# Allegro board KG200Z-TE.brd
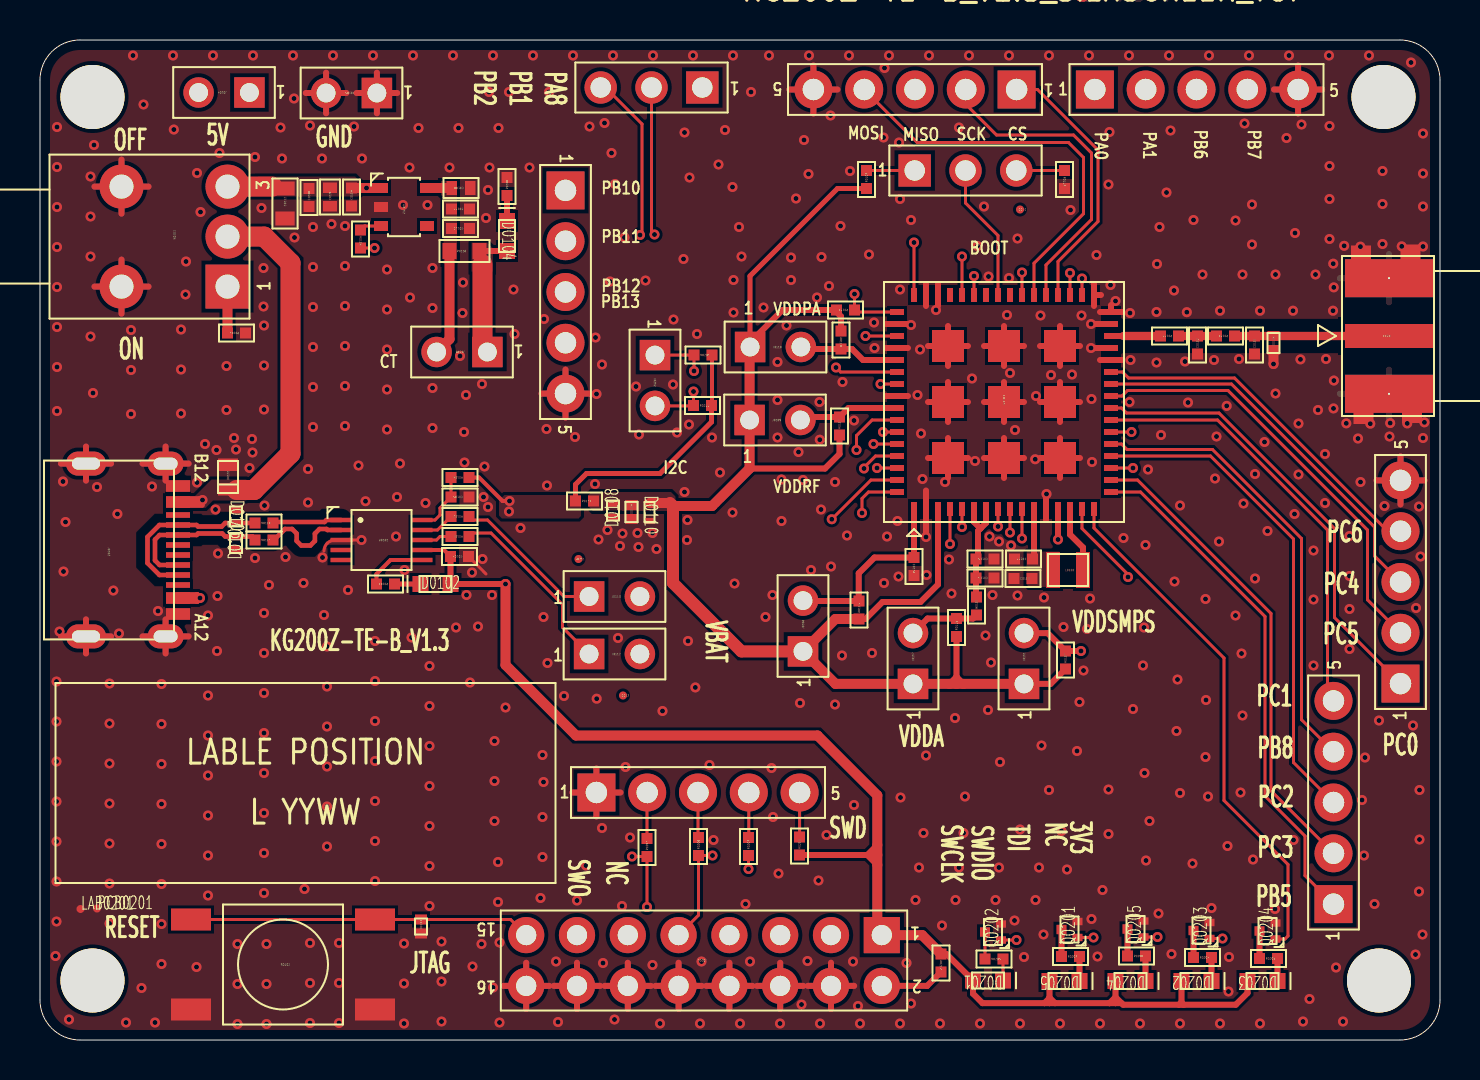
[diagram p0: board, top side]
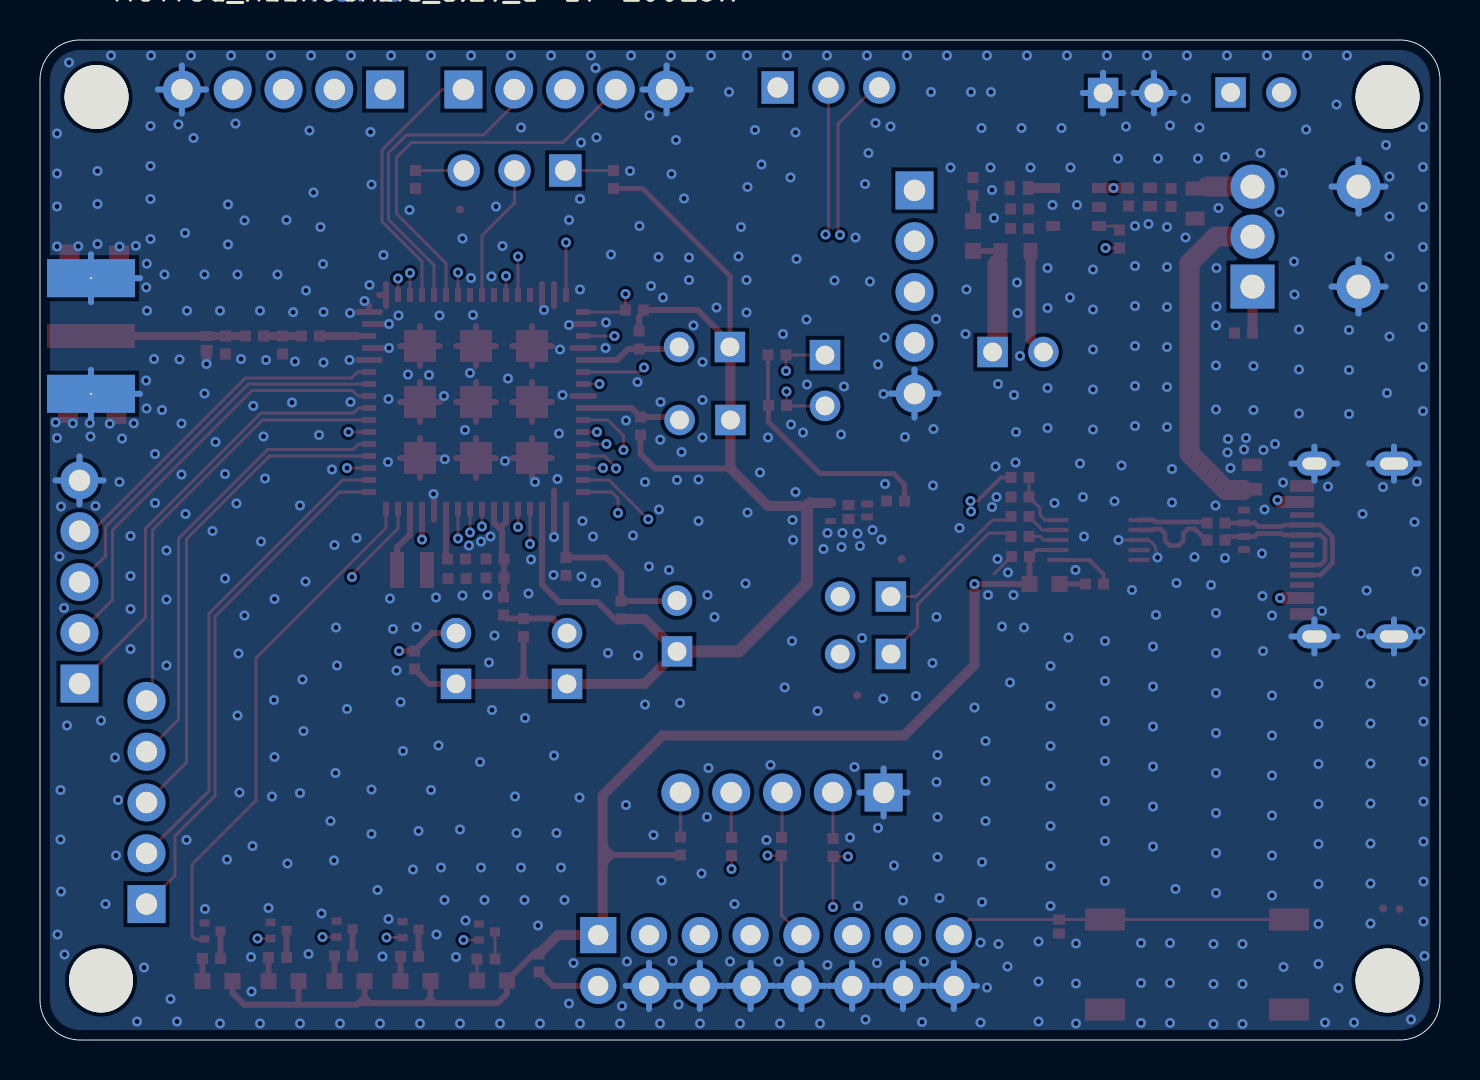
[diagram p1: board, bottom side, seen from below]

Outline 70 x 50 mm; copper layers: TOP, INNER LAYER 2, INNER LAYER 3, BOTTOM. Coordinates in mm from the lower left corner of the outline.
Outline path: 0,48 0,2 arc(0.59,0.59) 2,0 68,0 arc(69.41,0.59) 70,2 70,48 arc(69.41,49.41) 68,50 2,50 arc(0.59,49.41) 0,48

## Design rules (mm)
net group 50OHM: nets 50OHM_LORA_2 50OHM_LORA_3
net group 90OHM_USB_D: nets 90OHM_USB_DN 90OHM_USB_DP
net group DP1: nets 90OHM_USB_DN_C 90OHM_USB_DP_C

## Placement (name value [footprint] x y rotation side)
B0101  600ohm@100MHz DCR=0.340ohm 0.5A  [B-0402_H0_65]  46.83 21.7 90 top
C0101  NM-6.8pF +/-0.5pF 50V  [C-0402]  60.73 34.75 90 top
C0102  NM-6.8pF +/-0.5pF 50V  [C-0402]  57.88 34.75 90 top
C0104  100nF +/-10% 10V  [C-0402]  20.98 24.18 180 top
C0105  NM-100nF +/-10% 10V  [C-0402]  21 27.15 180 top
C0106  100nF +/-10% 10V  [C-0402]  13.45 42.12 90 top
C0107  4.7uF +/-20% 10V  [C-0402_4_7_10UF_H0_65]  14.5 42.15 90 top
C0108  4.7uF +/-20% 10V  [C-0402_4_7_10UF_H0_65]  21.05 42.6 180 top
C0109  100nF +/-10% 10V  [C-0402]  15.57 42.15 90 top
C0110  100nF +/-10% 10V  [C-0402]  21.02 40.58 180 top
C0111  1uF +/-10% 25V  [C-0402]  21.02 41.55 180 top
C0112  10uF +/-20% 10V  [C-0603_22_47UF_H1_00]  12.25 41.83 90 top
C0113  470nF +/-10% 6.3V  [C-0402]  49.15 23.07 0 top
C0114  4.7uF +/-20%  16V  [C-0402_H0_65]  47.25 23.1 180 top
C0115  100nF +/-10% 10V  [C-0402]  47.25 24.05 180 top
C0116  100nF +/-10% 10V  [C-0402]  43.7 23.68 270 top
C0117  100nF +/-10% 10V  [C-0402]  49.17 24.05 180 top
D0101  -  [PTVSHC2EN7VU]  9.4 28.15 90 top
D0102  -  [LTST-C193KRKT-5A]  19.77 22.8 0 top
D0103  -  [PESDNC9D5VB]  19.05 5.67 90 top
D0104  -  [LTST-C193KRKT-5A]  23.35 40.2 270 top
D0105  NM-PESDMC2FD5VB  [PESDMC2FD5VB]  61.67 34.85 90 top
D0106  -  [WE05DUCF-BF]  9.8 26.18 270 top
D0107  -  [WE05DUCF-BF]  9.8 24.85 90 top
D0108  -  [WE05DUCF-BF]  28.65 26.48 90 top
D0109  -  [PESDNC2FD5VB]  29.57 26.4 90 top
D0110  TEA10402V05B0  [LXES15AAA1-153]  30.48 26.4 270 top
D0201  -  [LTST-C193TBKT-5A]  47.4 2.98 180 top
D0202  -  [LTST-C193TBKT-5A]  57.83 2.95 180 top
D0203  -  [LTST-C193TBKT-5A]  61.12 2.95 180 top
D0204  -  [LTST-C193TBKT-5A]  54.52 2.95 180 top
D0205  -  [LTST-C193TBKT-5A]  51.23 2.95 180 top
H0201  npth_cir3_20  [NPTH_CIR3_20]  2.62 47.15 0 top
H0202  npth_cir3_20  [NPTH_CIR3_20]  2.62 2.98 0 top
H0203  npth_cir3_20  [NPTH_CIR3_20]  66.95 2.98 0 top
H0204  npth_cir3_20  [NPTH_CIR3_20]  67.17 47.15 0 top
J0101  C2542VD10205G0105PE  [IDE_2_2_54]  49.2 19.07 90 top
J0102  -  [UC6-0B1631R0-N]  3.45 24.5 270 top
J0103  -  [HC1650650]  67.45 35.2 180 top
J0104  C2542VD10205G0105PE  [IDE_2_2_54]  9.2 47.38 180 top
J0105  C2542VD10205G0105PE  [IDE_2_2_54]  15.57 47.35 180 top
J0106  C2542VD10205G0105PE  [IDE_2_2_54]  38.15 20.7 90 top
J0107  C2542VD10205G0105PE  [IDE_2_2_54]  43.65 19.07 90 top
J0108  C2542VD10205G0105PE  [IDE_2_2_54]  21.1 34.4 180 top
J0109  C2542VD10205G0105PE  [IDE_2_2_54]  36.75 31 0 top
J0110  C2542VD10205G0105PE  [IDE_2_2_54]  36.77 34.65 0 top
J0111  -  [KR2542VD10310G0101PX]  46.27 43.48 0 top
J0112  C2542VD10205G0105PE  [IDE_2_2_54]  28.73 19.3 0 top
J0113  C2542VD10205G0105PE  [IDE_2_2_54]  28.73 22.18 0 top
J0201  -  [C254VD208115PK]  33.2 3.98 180 top
J0202  C2542VD10205G0105PE  [IDE_2_2_54]  30.75 32.98 270 top
J0203  -  [KR2542VD10310G0101PX]  30.57 47.62 180 top
J0204  -  [KRQZ050002]  64.67 11.88 90 top
J0205  -  [KRQZ050002]  32.9 12.38 0 top
J0206  -  [KRQZ050002]  43.75 47.52 180 top
J0207  -  [KRQZ050002]  68.03 22.9 90 top
J0208  -  [KRQZ050002]  57.83 47.52 0 top
J0209  -  [KRQZ050002]  26.27 37.4 270 top
J0210  PH254002J-21400  [PH254002J-21400_PINS1_2D4X5]  49 41.52 0 top
J0211  PH254002J-21400  [PH254002J-21400_PINS1_2D4X5]  26.93 24.05 0 top
J0212  PH254002J-21400  [PH254002J-21400_PINS1_2D4X5]  29.15 17.23 0 top
L0102  15uH +/-20% 1.258ohm 440mA  [L-2016]  51.4 23.5 0 top
LAB0201  25x10mm Universal Label Paper_GDL  [LABEL]  2.02 6.55 0 top
PCB0201  PCB  [BOARD_PCB]  2.85 6.58 0 top
Q0201  RUM001L02T2CL  [VMT3_2SK3541-NMOS]  51.48 5.53 90 top
Q0202  RUM001L02T2CL  [VMT3_2SK3541-NMOS]  47.65 5.4 90 top
Q0203  RUM001L02T2CL  [VMT3_2SK3541-NMOS]  58.08 5.47 90 top
Q0204  RUM001L02T2CL  [VMT3_2SK3541-NMOS]  61.38 5.45 90 top
Q0205  RUM001L02T2CL  [VMT3_2SK3541-NMOS]  54.77 5.55 90 top
R0101  0R +/-5% 1/16W  [R-0402]  21 25.18 180 top
R0102  0R +/-5% 1/16W  [R-0402]  21 26.18 180 top
R0103  1K +/-5% 1/16W  [R-0402]  17.27 22.8 180 top
R0104  1K +/-5% 1/16W  [R-0402]  9.82 35.35 180 top
R0105  10K +/-5% 1/16W  [R-0402]  16.02 40.05 270 top
R0106  0R +/-5% 1/16W  [R-0402]  21 28.12 180 top
R0107  0R +/-5% 1/16W  [R-0402]  51.27 19 90 top
R0108  2.2K +/-5% 1/16W  [R-0402]  23.35 42.67 90 top
R0109  0R +/-5% 1/16W  [R-0402]  41.33 43.02 90 top
R0110  0R +/-5% 1/16W  [R-0402]  11.2 25.85 0 top
R0111  0R +/-5% 1/16W  [R-0402]  11.2 25 0 top
R0112  10K +/-5% 1/16W  [R-0402]  51.23 43.02 270 top
R0113  47K +/-5% 1/16W  [R-0402]  40.27 36.5 180 top
R0114  0R +/-5% 1/16W  [R-0402]  40.95 21.5 90 top
R0115  0R +/-5% 1/16W  [R-0402]  45.83 20.62 90 top
R0116  0R +/-5% 1/10W  [R-0603]  21.23 39.45 0 top
R0117  0R +/-5% 1/16W  [R-0402]  39.98 30.7 90 top
R0118  0R +/-5% 1/16W  [R-0402]  40.05 35 270 top
R0119  0R +/-5% 1/16W  [R-0402]  27.23 26.95 0 top
R0120  0R +/-5% 1/16W  [R-0402]  59.27 35.2 180 top
R0121  0R +/-5% 1/16W  [R-0402]  56.48 35.2 180 top
R0201  2.2K +/-5% 1/16W  [R-0402]  33.15 34.25 0 top
R0202  2.2K +/-5% 1/16W  [R-0402]  51.52 4.17 0 top
R0203  2.2K +/-5% 1/16W  [R-0402]  47.7 4.05 0 top
R0204  2.2K +/-5% 1/16W  [R-0402]  58.12 4.12 0 top
R0205  2.2K +/-5% 1/16W  [R-0402]  61.42 4.08 0 top
R0206  2.2K +/-5% 1/16W  [R-0402]  54.83 4.2 0 top
R0207  0R +/-5% 1/16W  [R-0402]  30.35 9.62 90 top
R0208  0R +/-5% 1/16W  [R-0402]  32.92 9.68 90 top
R0209  0R +/-5% 1/16W  [R-0402]  35.42 9.68 90 top
R0210  0R +/-5% 1/16W  [R-0402]  37.98 9.7 90 top
R0211  2.2K +/-5% 1/16W  [R-0402]  33.12 31.73 0 top
R0212  0R +/-5% 1/16W  [R-0402]  45.05 3.85 270 top
S0101  -  [ZK838304R01]  6.72 40.15 90 top
S0102  -  [TVDM04-B043EBS]  12.15 3.77 0 top
U0101  -  [CH340E]  17.07 25 0 top
U0102  WL2803E33-5/TR  [WL2803E33-5_TR_PINS5_3D12X3]  18.2 41.65 270 top
U0103  KG200Z_INTERNAL  [KG200T_INTERNAL]  48.2 31.9 90 top

## Library data of the parts
B0101 = B-0402_H0_65
C0101 C0102 C0104 C0105 C0106 C0109 C0110 C0113 C0115 C0116 C0117 = C
C0107 C0108 = C-0402_4_7_10uF_H0_65
C0111 = C-0402
C0112 = c-0603_22_47uf_H1_00
C0114 = C-0402_H0_65
D0101 = PTVSHC2EN7VU
D0102 D0104 = LTST-C193KRKT-5A
D0103 = PESDNC9D5VB
D0105 = PESDMC2FD5VB
D0106 D0107 D0108 = WE05DUCF-BF
D0109 = PESDNC2FD5VB
D0110 = LXES15AAA1-153
D0201 D0202 D0203 D0204 D0205 = LTST-C193TBKT-5A
H0201 H0202 H0203 H0204 = NPTH
J0101 J0104 J0105 J0106 J0107 J0108 J0109 J0110 J0112 J0113 J0202 = IDE_2_2_54
J0102 = UC6-0B1631R0-N
J0103 = HC1650650
J0111 J0203 = KR2542VD10310G0101PX
J0201 = C254VD208115PK
J0204 J0205 J0206 J0207 J0208 J0209 = KRQZ050002
J0210 J0211 J0212 = PH254002J-21400
L0102 = L-2016
LAB0201 = LABEL
PCB0201 = BOARD_PCB
Q0201 Q0202 Q0203 Q0204 Q0205 = VMT3_2SK3541-NMOS
R0101 R0102 R0103 R0104 R0106 R0107 R0108 R0109 R0112 R0113 R0114 R0115 R0117 R0118 R0119 R0120 R0121 R0201 R0202 R0203 R0204 R0205 R0206 R0207 R0208 R0209 R0210 R0211 R0212 = R-0402
R0105 R0110 R0111 = R
R0116 = R-0603
S0101 = ZK838304R01
S0102 = TVDM04-B043EBS
U0101 = CH340E
U0102 = WL2803E33-5_TR
U0103 = KG200T_INTERNAL

## Footprints (pads in the part's own frame, mm; a bottom-side part is the same pattern mirrored in y, then rotated)
B-0402_H0_65
  rect 0.55x0.55 smd: 1(-0.45,0) 2(0.45,0)
BOARD_PCB
  round 0.4 smd: 1(0,0)
C254VD208115PK
  rect 1.81x1.81 hole 1.01: 1(-8.89,-1.27)
  round 1.81 hole 1.01: 2(-8.89,1.27) 3(-6.35,-1.27) 4(-6.35,1.27) 5(-3.81,-1.27) 6(-3.81,1.27) 7(-1.27,-1.27) 8(-1.27,1.27) 9(1.27,-1.27) 10(1.27,1.27) 11(3.81,-1.27) 12(3.81,1.27) 13(6.35,-1.27) 14(6.35,1.27) 15(8.89,-1.27) 16(8.89,1.27)
C-0402
  rect 0.55x0.55 smd: 1(-0.45,0) 2(0.45,0)
C-0402_4_7_10UF_H0_65
  rect 0.525x0.7 smd: 1(-0.463,0) 2(0.463,0)
C-0402_H0_65
  rect 0.55x0.55 smd: 1(-0.45,0) 2(0.45,0)
C-0603_22_47UF_H1_00
  rect 0.7x0.96 smd: 1(-0.75,0) 2(0.75,0)
CH340E
  rect 1.05x0.22 smd: 1(-2.025,1) 2(-2.025,0.5) 3(-2.025,0) 4(-2.025,-0.5) 5(-2.025,-1) 6(2.025,-1) 7(2.025,-0.5) 8(2.025,0) 9(2.025,0.5) 10(2.025,1)
HC1650650
  rect 4.4x1.2 smd: 1(0,0)
  rect 4.4x1.9 hole 0.1: 2(0,2.89) 3(0,-2.89)
IDE_2_2_54
  rect 1.524x1.524 hole 0.94: 1(-1.27,0)
  round 1.524 hole 0.94: 2(1.27,0)
KG200T_INTERNAL
  rect 0.7x0.3 smd: 1(-5.35,4.5) 2(-5.35,3.9) 3(-5.35,3.3) 4(-5.35,2.7) 5(-5.35,2.1) 6(-5.35,1.5) 7(-5.35,0.9) 8(-5.35,0.3) 9(-5.35,-0.3) 10(-5.35,-0.9) 11(-5.35,-1.5) 12(-5.35,-2.1) 13(-5.35,-2.7) 14(-5.35,-3.3) 15(-5.35,-3.9) 16(-5.35,-4.5) 33(5.35,-4.5) 34(5.35,-3.9) 35(5.35,-3.3) 36(5.35,-2.7) 37(5.35,-2.1) 38(5.35,-1.5) 39(5.35,-0.9) 40(5.35,-0.3) 41(5.35,0.3) 42(5.35,0.9) 43(5.35,1.5) 44(5.35,2.1) 45(5.35,2.7) 46(5.35,3.3) 47(5.35,3.9) 48(5.35,4.5)
  rect 0.3x0.7 smd: 17(-4.5,-5.35) 18(-3.9,-5.35) 19(-3.3,-5.35) 20(-2.7,-5.35) 21(-2.1,-5.35) 22(-1.5,-5.35) 23(-0.9,-5.35) 24(-0.3,-5.35) 25(0.3,-5.35) 26(0.9,-5.35) 27(1.5,-5.35) 28(2.1,-5.35) 29(2.7,-5.35) 30(3.3,-5.35) 31(3.9,-5.35) 32(4.5,-5.35) 49(4.5,5.35) 50(3.9,5.35) 51(3.3,5.35) 52(2.7,5.35) 53(2.1,5.35) 54(1.5,5.35) 55(0.9,5.35) 56(0.3,5.35) 57(-0.3,5.35) 58(-0.9,5.35) 59(-1.5,5.35) 60(-2.1,5.35) 61(-2.7,5.35) 62(-3.3,5.35) 63(-3.9,5.35) 64(-4.5,5.35)
  rect 1.6x1.6 smd: 65(-2.8,2.8) 66(0,2.8) 67(2.8,2.8) 68(-2.8,0) 69(0,0) 70(2.8,0) 71(-2.8,-2.8) 72(0,-2.8) 73(2.8,-2.8)
KR2542VD10310G0101PX
  rect 1.62x1.62 hole 1.02: 1(-2.54,0)
  round 1.62 hole 1.02: 2(0,0) 3(2.54,0)
KRQZ050002
  rect 1.9x1.9 hole 1.07: 1(-5.08,0)
  round 1.9 hole 1.07: 2(-2.54,0) 3(0,0) 4(2.54,0) 5(5.08,0)
L-2016
  rect 0.7x1.8 smd: 1(-0.75,0) 2(0.75,0)
LABEL
  round 0.4 smd: 1(0,0)
LTST-C193KRKT-5A
  rect 0.8x0.8 smd: 1(-0.75,0) 2(0.75,0)
LTST-C193TBKT-5A
  rect 0.8x0.8 smd: 1(-0.75,0) 2(0.75,0)
LXES15AAA1-153
  rect 0.3x0.55 smd: 1(-0.45,0) 2(0.45,0)
NPTH_CIR3_20
  round 3.2 hole 3.2 unplated: (0,0)
PESDMC2FD5VB
  rect 0.5x0.6 smd: 1(-0.35,0) 2(0.35,0)
PESDNC2FD5VB
  rect 0.5x0.6 smd: 1(-0.35,0) 2(0.35,0)
PESDNC9D5VB
  rect 0.5x0.6 smd: 1(-0.35,0) 2(0.35,0)
PH254002J-21400_PINS1_2D4X5
  round 0.4 smd: 1(0,0)
PTVSHC2EN7VU
  rect 0.625x1 smd: 1(-0.613,0) 2(0.613,0)
R-0402
  rect 0.55x0.55 smd: 1(-0.45,0) 2(0.45,0)
R-0603
  rect 0.7x0.8 smd: 1(-0.75,0) 2(0.75,0)
TVDM04-B043EBS
  rect 2x1.1 smd: 1(-4.6,2.25) 2(4.6,2.25) 3(-4.6,-2.25) 4(4.6,-2.25)
UC6-0B1631R0-N
  oval 1.2x1.8 hole 0.6x1.2: 1(-4.32,2.83) 4(4.32,2.83)
  oval 1.2x2 hole 0.6x1.4: 2(-4.32,-1.15) 3(4.32,-1.15)
  rect 0.29x1.2 smd: A1(-3.055,3.45) A4(-2.255,3.45) A9(2.545,3.45) A12(3.345,3.45) B1(3.055,3.45) B4(2.255,3.45) B9(-2.545,3.45) B12(-3.345,3.45)
  rect 0.28x1.2 smd: A5(-1.75,3.45) A6(-1.25,3.45) A7(-0.75,3.45) A8(-0.25,3.45) B5(1.75,3.45) B6(1.25,3.45) B7(0.75,3.45) B8(0.25,3.45)
VMT3_2SK3541-NMOS
  rect 0.37x0.5 smd: 1(-0.4,-0.4) 2(0.4,-0.4)
  rect 0.47x0.5 smd: 3(0,0.4)
WE05DUCF-BF
  rect 0.35x0.6 smd: 1(-0.325,0) 2(0.325,0)
WL2803E33-5_TR_PINS5_3D12X3
  rect 0.5x0.7 smd: 1(-0.95,-1.15) 2(0,-1.15) 3(0.95,-1.15) 4(0.95,1.15) 5(-0.95,1.15)
ZK838304R01
  rect 2.2x2.2 hole 1.2: 1(-2.48,-2.65)
  round 2.2 hole 1.2: 2(0.02,-2.65) 3(2.52,-2.65) 4(-2.48,2.65) 5(2.52,2.65)

## Nets
GND: C0101.1 C0102.1 C0104.1 C0105.1 C0106.1 C0107.1 C0108.1 C0109.1 C0110.1 C0111.1 C0112.1 C0113.1 C0114.1 C0115.1 C0116.2 C0117.2 D0101.2 D0103.1 D0105.1 D0106.1 D0107.1 D0108.1 D0109.1 D0110.2 J0102.1 J0102.2 J0102.3 J0102.4 J0102.A1(GND1) J0102.A12(GND2) J0102.B1(GND3) J0102.B12(GND4) J0103.2 J0103.3 J0105.1 J0105.2 J0201.4 J0201.6 J0201.8 J0201.10 J0201.12 J0201.14 J0201.16 J0205.1 J0206.5 J0207.5 J0208.5 J0209.5 LAB0201.1 PCB0201.1(GND) Q0201.2(S) Q0202.2(S) Q0203.2(S) Q0204.2(S) Q0205.2(S) R0104.1 R0108.2 R0112.2 S0101.4 S0101.5 S0102.3 S0102.4 U0101.3(GND) U0102.2(GND) U0103.2(GND1) U0103.12(GND2) U0103.28(GND3) U0103.29(GND4) U0103.31(GND5) U0103.32(GND6) U0103.33(GND7) U0103.46(GND8) U0103.47(GND9) U0103.50(GND10) U0103.52(GND11) U0103.56(GND12) U0103.65(GND13) U0103.66(GND14) U0103.67(GND15) U0103.68(GND16) U0103.69(GND17) U0103.70(GND18) U0103.71(GND19) U0103.72(GND20) U0103.73(GND21)
VBAT: C0116.1 J0106.2 R0114.2 U0103.1(VBAT)
VCC_5V: C0106.2 C0107.2 C0109.2 C0112.2 R0105.2 S0101.3 U0102.1(VIN)
VDD_3V3: C0104.2 D0102.2 D0104.2 D0201.2 D0202.2 D0203.2 D0204.2 D0205.2 J0108.1 J0201.1 R0106.1 R0116.2 R0119.1 R0201.2 R0210.1 R0211.2 R0212.1 U0101.7(VCC)
VDD_3V3_M: D0108.2 D0109.2 D0110.1 J0101.1 J0106.1 J0107.1 J0109.1 J0110.1 R0107.1 R0109.1 R0113.2 R0114.1 R0115.1 R0117.1 R0118.1 R0119.2 U0103.3(VDD)
VDDA: B0101.1 J0107.2 R0115.2
VDDPA: J0110.2 R0118.2 U0103.53(VDDPA)
VDDRF: J0109.2 R0117.2 U0103.57(VDDRF)
VDDSMPS: J0101.2 R0107.2 U0103.13(VDDSMPS)
50OHM_LORA_2: C0102.2 R0120.2 R0121.1
50OHM_LORA_3: C0101.2 D0105.2 J0103.1 R0120.1
90OHM_USB_DN: R0111.2 U0101.2(UD-)
90OHM_USB_DN_C: D0107.2 J0102.A7(DN1) J0102.B7(DN2) R0111.1
90OHM_USB_DP: R0110.2 U0101.1(UD+)
90OHM_USB_DP_C: D0106.2 J0102.A6(DP1) J0102.B6(DP2) R0110.1
ANT_LORA: R0121.2 U0103.30(ANT_LORA)
BOOT0: J0111.2 U0103.41(BOOT0)
CH340_RX: J0113.1 R0102.1
CH340_TX: J0112.1 R0101.1
I2C1_SCL_PA9: J0202.1 R0201.1 U0103.51(PA9)
I2C1_SDA_PA10: J0202.2 R0211.1 U0103.60(PA10)
J_TDI_PA15: J0201.5 U0103.10(PA15)
LPUART1_RX_PA3: J0112.2 U0103.35(PA3)
LPUART1_TX_PA2: J0113.2 U0103.34(PA2)
PA0: J0208.1 U0103.62(PA0)
PA1: J0208.2 U0103.61(PA1)
PA8: J0203.1 U0103.44(PA8)
PA12: Q0203.1(G) U0103.64(PA12)
PB1: J0203.2 U0103.55(PB1)
PB2: J0203.3 U0103.59(PB2)
PB4: Q0204.1(G) U0103.16(PB4)
PB5: J0204.1 U0103.17(PB5)
PB8: J0204.4 U0103.21(PB8)
PB9: Q0201.1(G) U0103.8(PB9)
PB10: J0209.1 U0103.39(PB10)
PB11: J0209.2 U0103.43(PB11)
PB12: J0209.3 U0103.54(PB12)
PB13: J0209.4 U0103.58(PB13)
PB14: Q0205.1(G) U0103.5(PB14)
PB15: Q0202.1(G) U0103.9(PB15)
PC0: J0207.1 U0103.24(PC0)
PC1: J0204.5 U0103.23(PC1)
PC2: J0204.3 U0103.20(PC2)
PC3: J0204.2 U0103.18(PC3)
PC4: J0207.3 U0103.26(PC4)
PC5: J0207.2 U0103.25(PC5)
PC6: J0207.4 U0103.27(PC6)
RESET_N: D0103.2 J0201.15 R0113.1 R0209.1 S0102.1 S0102.2 U0103.49(RESET_N)
SPI1_MISO_PA6: J0206.3 U0103.48(PA6)
SPI1_MOSI_PA7: J0206.4 U0103.38(PA7)
SPI1_NSS_PA4: J0206.1 U0103.36(PA4)
SPI1_SCK_PA5: J0206.2 U0103.37(PA5)
SWCLK_PA14: J0201.9 R0208.1 U0103.4(SWCLK_PA14)
SWDIO_PA13: J0201.7 R0207.1 U0103.63(SWDIO_PA13)
T_SWO_PB3: J0201.13 U0103.15(PB3)
USART1_RX_PB7: J0208.4 U0103.19(PB7)
USART1_TX_PB6: J0208.3 U0103.22(PB6)
N00687: D0101.1 J0102.A4(VBUS1) J0102.A9(VBUS2) J0102.B4(VBUS3) J0102.B9(VBUS4) J0104.1 J0104.2 S0101.2
N16030587: C0105.2 R0106.2 U0101.10(V3)
N16030701: R0101.2 U0101.8(TXD)
N16030737: R0102.2 U0101.9(RXD)
N16030765: R0103.2 U0101.6(TNOW)
N16030785: D0102.1 R0103.1
N16031948: R0105.1 U0102.3(EN)
N16031996: C0108.2 C0110.2 C0111.2 J0108.2 R0116.1 U0102.5(VOUT)
N16032104: D0104.1 R0108.1
N16044226: L0102.2 U0103.14(VLXSMPS)
N16044230: C0113.2 C0117.1 L0102.1 U0103.11(VFBSMPS)
N16044759: J0111.3 R0112.1
N16050454: B0101.2 C0114.2 C0115.2 U0103.6(VREF+) U0103.7(VDDA)
N16074451: J0205.2 R0207.2
N16074491: J0205.3 R0208.2
N16074519: J0205.4 R0209.2
N16074543: J0205.5 R0210.2
N16076601: J0201.2 R0212.2
N16077605: Q0201.3(D) R0202.1
N16077613: D0205.1 R0202.2
N16077691: Q0202.3(D) R0203.1
N16077699: D0201.1 R0203.2
N16077773: Q0203.3(D) R0204.1
N16077801: D0202.1 R0204.2
N16077881: Q0204.3(D) R0205.1
N16077901: D0203.1 R0205.2
N16077963: Q0205.3(D) R0206.1
N16077967: D0204.1 R0206.2
N16137832: J0111.1 R0109.2
N160326830: R0104.2 S0101.1

Pads without a net: J0102 A5 A8 B5 B8; J0201 3 11; J0210 1; J0211 1; J0212 1; U0101 4 5; U0102 4; U0103 40 42 45

## Via types
v1: diameter 0.5, hole 0.25, TOP to BOTTOM, 686 vias

## Routing (per net, layer and track width the routed paths; a pad name or vN(x,y) marks a point on that pad's centre or on a via; arc(x,y) is an arc through that point)
GND: length 451.3
  TOP w0.15: C0104.1 22.3,23.3 ; 16.05,25 U0101.3 14.76,25 arc(14.54,24.96) 14.36,24.83 arc(14.24,24.66) 14.2,24.45
  TOP w0.3: 44.9,36.7 U0103.46 44.9,37.8 ; 23.15,2.71 24.31,2.71 ; 24.31,2.71 24.31,3.86 ; 24.31,2.71 24.31,1.55 ; 24.31,2.71 25.47,2.71 ; J0208.5 62.91,48.73 ; J0208.5 62.91,46.32 ; J0208.5 61.7,47.52 ; J0208.5 64.11,47.52 ; J0209.5 26.27,33.52 ; J0209.5 27.48,32.32 ; J0209.5 26.27,31.12 ; J0209.5 25.07,32.32 ; 44.3,36.7 U0103.47 44.3,37.8 ; J0206.5 38.67,48.73 ; J0206.5 39.87,47.52 ; J0206.5 37.47,47.52 ; J0206.5 38.67,46.32 ; 50,29.1 U0103.71 ; U0103.71 51,28.1 ; U0103.71 51,30.1 ; U0103.71 52,29.1 ; 68.03,26.78 J0207.5 ; J0207.5 69.23,27.98 ; J0207.5 66.82,27.98 ; J0207.5 68.03,29.18 ; 26.85,1.55 26.85,2.71 ; 26.85,2.71 28.01,2.71 ; 26.85,2.71 25.69,2.71 ; 26.85,2.71 26.85,3.86 ; J0102.3 3.55,20.18 ; J0102.3 2.3,19.33 ; J0102.3 1.05,20.18 ; J0102.3 2.3,21.03 ; J0105.2 15.32,47.35 ; J0105.2 13.29,47.35 ; J0105.2 14.3,48.36 ; J0105.2 14.3,46.34 ; J0201.4 40.71,2.71 ; J0201.4 38.39,2.71 ; J0201.4 39.55,3.86 ; J0201.4 39.55,1.55 ; 42.3,32.2 U0103.56 43.4,32.2 ; U0103.32 53.55,36.75 ; U0103.32 54.1,36.4 ; U0103.32 53,36.4 ; U0103.67 45.4,35.7 ; U0103.67 46.4,34.7 ; U0103.67 44.4,34.7 ; U0103.67 45.4,33.7 ; J0201.6 38.17,2.71 ; J0201.6 35.85,2.71 ; J0201.6 37.01,3.86 ; J0201.6 37.01,1.55 ; 16.84,46.34 J0105.1 ; J0105.1 15.83,47.35 ; J0105.1 17.86,47.35 ; J0105.1 16.84,48.36 ; 27.82,11.17 J0205.1 ; J0205.1 29.02,12.38 ; J0205.1 26.62,12.38 ; J0205.1 27.82,13.58 ; U0103.66 46.4,31.9 ; U0103.66 44.4,31.9 ; U0103.66 45.4,32.9 ; U0103.66 45.4,30.9 ; v1(44.3,25.15) U0103.2 44.3,27.48 ; U0103.72 52,31.9 ; U0103.72 51,32.9 ; U0103.72 51,30.9 ; U0103.72 50,31.9 ; 29.39,1.55 29.39,2.71 ; 29.39,2.71 28.23,2.71 ; 29.39,2.71 29.39,3.86 ; 29.39,2.71 30.55,2.71 ; 42.3,34.6 U0103.52 43.4,34.6 ; J0102.1 6.28,29.67 ; J0102.1 6.28,27.97 ; J0102.1 7.43,28.82 ; J0102.1 5.13,28.82 ; 45.4,28.1 U0103.65 ; U0103.65 46.4,29.1 ; U0103.65 44.4,29.1 ; U0103.65 45.4,30.1 ; J0102.2 3.55,28.82 ; J0102.2 1.05,28.82 ; J0102.2 2.3,29.67 ; J0102.2 2.3,27.97 ; 51,33.7 U0103.73 ; U0103.73 52,34.7 ; U0103.73 50,34.7 ; U0103.73 51,35.7 ; 6.28,19.33 J0102.4 ; J0102.4 6.28,21.03 ; J0102.4 7.43,20.18 ; J0102.4 5.13,20.18 ; 42.3,35.8 U0103.50 43.4,35.8 ; 34.47,1.55 J0201.8 ; J0201.8 33.31,2.71 ; J0201.8 35.63,2.71 ; J0201.8 34.47,3.86 ; 4.08,37.67 5.43,37.67 ; 4.08,37.67 4.08,39.02 ; 4.08,37.67 2.72,37.67 ; 4.08,37.67 4.08,36.32 ; 4.08,42.67 4.08,44.02 ; 4.08,42.67 5.43,42.67 ; 4.08,42.67 4.08,41.32 ; 4.08,42.67 2.72,42.67 ; U0103.29 v1(52.55,34.6) ; 48.2,30.9 U0103.69 ; U0103.69 49.2,31.9 ; U0103.69 47.2,31.9 ; U0103.69 48.2,32.9 ; 48.2,28.1 U0103.68 ; U0103.68 48.2,30.1 ; U0103.68 49.2,29.1 ; U0103.68 47.2,29.1 ; 48.2,33.7 U0103.70 ; U0103.70 48.2,35.7 ; U0103.70 49.2,34.7 ; U0103.70 47.2,34.7 ; 50.3,26 U0103.12 50.3,27.1 ; 52.7,36.7 U0103.33 ; U0103.33 53.05,37.25 ; U0103.33 52.7,37.8 ; J0201.10 31.93,3.86 ; J0201.10 30.77,2.71 ; J0201.10 31.93,1.55 ; J0201.10 33.09,2.71 ; 53,34 U0103.28 54.1,34 ; U0103.31 v1(52.55,35.8)
  TOP w0.5: D0105.1 v1(61.67,33.8)
  INNER LAYER 2 w0.3: J0201.8 35.63,2.71 ; J0201.8 34.47,1.55 ; J0201.8 33.31,2.71 ; J0201.8 34.47,3.86 ; 29.39,2.71 29.39,3.86 ; 29.39,2.71 29.39,1.55 ; 29.39,2.71 30.55,2.71 ; 29.39,2.71 28.23,2.71 ; 38.39,2.71 J0201.4 ; J0201.4 39.55,3.86 ; J0201.4 39.55,1.55 ; J0201.4 40.71,2.71 ; 16.84,46.34 J0105.1 ; J0105.1 16.84,48.36 ; J0105.1 17.86,47.35 ; J0105.1 15.83,47.35 ; 26.62,12.38 J0205.1 ; J0205.1 27.82,13.58 ; J0205.1 27.82,11.17 ; J0205.1 29.02,12.38 ; J0102.4 6.28,21.03 ; J0102.4 6.28,19.33 ; J0102.4 7.43,20.18 ; J0102.4 5.13,20.18 ; J0207.5 68.03,29.18 ; J0207.5 69.23,27.98 ; J0207.5 66.82,27.98 ; J0207.5 68.03,26.78 ; J0105.2 15.32,47.35 ; J0105.2 14.3,46.34 ; J0105.2 13.29,47.35 ; J0105.2 14.3,48.36 ; 2.3,27.97 J0102.2 ; J0102.2 2.3,29.67 ; J0102.2 3.55,28.82 ; J0102.2 1.05,28.82 ; 26.85,1.55 26.85,2.71 ; 26.85,2.71 28.01,2.71 ; 26.85,2.71 26.85,3.86 ; 26.85,2.71 25.69,2.71 ; J0103.2 67.95,32.31 ; J0103.2 67.45,31.81 ; J0103.2 67.45,32.81 ; J0103.2 66.95,32.31 ; J0201.6 37.01,3.86 ; J0201.6 37.01,1.55 ; J0201.6 35.85,2.71 ; J0201.6 38.17,2.71 ; 4.08,36.32 4.08,37.67 ; 4.08,37.67 5.43,37.67 ; 4.08,37.67 4.08,39.02 ; 4.08,37.67 2.72,37.67 ; 5.13,28.82 J0102.1 ; J0102.1 6.28,29.67 ; J0102.1 7.43,28.82 ; J0102.1 6.28,27.97 ; 61.7,47.52 J0208.5 ; J0208.5 62.91,48.73 ; J0208.5 64.11,47.52 ; J0208.5 62.91,46.32 ; 31.93,1.55 J0201.10 ; J0201.10 30.77,2.71 ; J0201.10 33.09,2.71 ; J0201.10 31.93,3.86 ; J0209.5 26.27,33.52 ; J0209.5 26.27,31.12 ; J0209.5 27.48,32.32 ; J0209.5 25.07,32.32 ; 2.72,42.67 4.08,42.67 ; 4.08,42.67 4.08,44.02 ; 4.08,42.67 5.43,42.67 ; 4.08,42.67 4.08,41.32 ; 24.31,2.71 24.31,3.86 ; 24.31,2.71 24.31,1.55 ; 24.31,2.71 25.47,2.71 ; 24.31,2.71 23.15,2.71 ; 38.67,46.32 J0206.5 ; J0206.5 38.67,48.73 ; J0206.5 37.47,47.52 ; J0206.5 39.87,47.52 ; 67.45,37.59 J0103.3 ; J0103.3 66.95,38.09 ; J0103.3 67.95,38.09 ; J0103.3 67.45,38.59 ; J0102.3 2.3,21.03 ; J0102.3 3.55,20.18 ; J0102.3 1.05,20.18 ; J0102.3 2.3,19.33
  INNER LAYER 3 w0.15: v1(43,42.05) 43,41.98 42.4,41.38 42.4,40.5 43.5,39.4 44.92,39.4 45.23,39.7 v1(46.88,39.7) ; v1(39.08,39.15) 39,39.08 38.83,39.08 ; v1(41.45,39.27) 41.75,39.27 44.52,36.5 v1(44.8,36.5)
  INNER LAYER 3 w0.3: 4.08,36.32 4.08,37.67 ; 4.08,37.67 4.08,39.02 ; 4.08,37.67 2.72,37.67 ; 4.08,37.67 5.43,37.67 ; J0105.1 16.84,48.36 ; J0105.1 17.86,47.35 ; J0105.1 15.83,47.35 ; J0105.1 16.84,46.34 ; 4.08,42.67 4.08,44.02 ; 4.08,42.67 4.08,41.32 ; 4.08,42.67 2.72,42.67 ; 4.08,42.67 5.43,42.67 ; 2.3,19.33 J0102.3 ; J0102.3 1.05,20.18 ; J0102.3 2.3,21.03 ; J0102.3 3.55,20.18 ; J0201.6 37.01,3.86 ; J0201.6 35.85,2.71 ; J0201.6 38.17,2.71 ; J0201.6 37.01,1.55 ; 13.29,47.35 J0105.2 ; J0105.2 15.32,47.35 ; J0105.2 14.3,48.36 ; J0105.2 14.3,46.34 ; 38.67,46.32 J0206.5 ; J0206.5 39.87,47.52 ; J0206.5 37.47,47.52 ; J0206.5 38.67,48.73 ; J0103.3 67.45,38.59 ; J0103.3 67.45,37.59 ; J0103.3 66.95,38.09 ; J0103.3 67.95,38.09 ; 5.13,28.82 J0102.1 ; J0102.1 6.28,29.67 ; J0102.1 7.43,28.82 ; J0102.1 6.28,27.97 ; 67.45,31.81 J0103.2 ; J0103.2 67.45,32.81 ; J0103.2 66.95,32.31 ; J0103.2 67.95,32.31 ; J0208.5 64.11,47.52 ; J0208.5 62.91,46.32 ; J0208.5 61.7,47.52 ; J0208.5 62.91,48.73 ; J0201.8 35.63,2.71 ; J0201.8 34.47,1.55 ; J0201.8 33.31,2.71 ; J0201.8 34.47,3.86 ; 1.05,28.82 J0102.2 ; J0102.2 2.3,29.67 ; J0102.2 3.55,28.82 ; J0102.2 2.3,27.97 ; J0209.5 27.48,32.32 ; J0209.5 26.27,33.52 ; J0209.5 25.07,32.32 ; J0209.5 26.27,31.12 ; 26.85,2.71 26.85,3.86 ; 26.85,2.71 25.69,2.71 ; 26.85,2.71 28.01,2.71 ; 26.85,2.71 26.85,1.55 ; J0102.4 6.28,21.03 ; J0102.4 7.43,20.18 ; J0102.4 6.28,19.33 ; J0102.4 5.13,20.18 ; 39.55,1.55 J0201.4 ; J0201.4 40.71,2.71 ; J0201.4 38.39,2.71 ; J0201.4 39.55,3.86 ; J0207.5 68.03,29.18 ; J0207.5 66.82,27.98 ; J0207.5 69.23,27.98 ; J0207.5 68.03,26.78 ; J0201.10 33.09,2.71 ; J0201.10 31.93,1.55 ; J0201.10 31.93,3.86 ; J0201.10 30.77,2.71 ; 24.31,2.71 25.47,2.71 ; 24.31,2.71 24.31,1.55 ; 24.31,2.71 24.31,3.86 ; 24.31,2.71 23.15,2.71 ; 28.23,2.71 29.39,2.71 ; 29.39,2.71 30.55,2.71 ; 29.39,2.71 29.39,3.86 ; 29.39,2.71 29.39,1.55 ; 26.62,12.38 J0205.1 ; J0205.1 27.82,13.58 ; J0205.1 29.02,12.38 ; J0205.1 27.82,11.17
  BOTTOM w0.3: J0201.10 31.93,3.86 ; J0201.10 33.09,2.71 ; J0201.10 30.77,2.71 ; J0201.10 31.93,1.55 ; 1.05,20.18 J0102.3 ; J0102.3 3.55,20.18 ; J0102.3 2.3,21.03 ; J0102.3 2.3,19.33 ; 24.31,2.71 24.31,3.86 ; 24.31,2.71 25.47,2.71 ; 24.31,2.71 23.15,2.71 ; 24.31,2.71 24.31,1.55 ; J0102.4 6.28,21.03 ; J0102.4 6.28,19.33 ; J0102.4 7.43,20.18 ; J0102.4 5.13,20.18 ; J0209.5 27.48,32.32 ; J0209.5 26.27,31.12 ; J0209.5 26.27,33.52 ; J0209.5 25.07,32.32 ; J0105.2 14.3,48.36 ; J0105.2 14.3,46.34 ; J0105.2 13.29,47.35 ; J0105.2 15.32,47.35 ; J0105.1 16.84,48.36 ; J0105.1 17.86,47.35 ; J0105.1 16.84,46.34 ; J0105.1 15.83,47.35 ; 4.08,41.32 4.08,42.67 ; 4.08,42.67 5.43,42.67 ; 4.08,42.67 4.08,44.02 ; 4.08,42.67 2.72,42.67 ; J0103.2 65,32.31 ; J0103.2 67.45,33.51 ; J0103.2 67.45,31.11 ; 68.03,26.78 J0207.5 ; J0207.5 68.03,29.18 ; J0207.5 66.82,27.98 ; J0207.5 69.23,27.98 ; 29.39,1.55 29.39,2.71 ; 29.39,2.71 29.39,3.86 ; 29.39,2.71 30.55,2.71 ; 29.39,2.71 28.23,2.71 ; 38.67,46.32 J0206.5 ; J0206.5 39.87,47.52 ; J0206.5 37.47,47.52 ; J0206.5 38.67,48.73 ; 25.69,2.71 26.85,2.71 ; 26.85,2.71 26.85,1.55 ; 26.85,2.71 28.01,2.71 ; 26.85,2.71 26.85,3.86 ; 35.85,2.71 J0201.6 ; J0201.6 37.01,3.86 ; J0201.6 38.17,2.71 ; J0201.6 37.01,1.55 ; J0102.1 6.28,29.67 ; J0102.1 6.28,27.97 ; J0102.1 7.43,28.82 ; J0102.1 5.13,28.82 ; 38.39,2.71 J0201.4 ; J0201.4 40.71,2.71 ; J0201.4 39.55,3.86 ; J0201.4 39.55,1.55 ; J0205.1 29.02,12.38 ; J0205.1 27.82,11.17 ; J0205.1 27.82,13.58 ; J0205.1 26.62,12.38 ; J0201.8 35.63,2.71 ; J0201.8 34.47,3.86 ; J0201.8 33.31,2.71 ; J0201.8 34.47,1.55 ; 4.08,36.32 4.08,37.67 ; 4.08,37.67 2.72,37.67 ; 4.08,37.67 5.43,37.67 ; 4.08,37.67 4.08,39.02 ; 2.3,27.97 J0102.2 ; J0102.2 3.55,28.82 ; J0102.2 1.05,28.82 ; J0102.2 2.3,29.67 ; J0103.3 65,38.09 ; J0103.3 67.45,39.29 ; J0103.3 67.45,36.89 ; 62.91,46.32 J0208.5 ; J0208.5 64.11,47.52 ; J0208.5 61.7,47.52 ; J0208.5 62.91,48.73
  vias: v1(0.85,45.65) v1(0.85,43.65) v1(0.85,41.65) v1(0.85,39.65) v1(0.85,37.65) v1(0.85,35.65) v1(0.85,33.65) v1(0.85,31.45) v1(0.82,17.93) v1(0.82,15.93) v1(0.82,13.93) v1(0.82,11.93) v1(0.82,9.93) v1(0.82,7.92) v1(0.82,5.92) v1(0.78,4.2) v1(0.97,20.43) v1(1.15,27.93) v1(1.18,23.43) v1(1.27,25.9) v1(1.45,1.02) v1(2.52,43.17) v1(2.52,41.17) v1(2.52,39.17) v1(2.52,35.17) v1(2.65,32.35) v1(2.7,44.75) v1(2.85,27.65) v1(3.48,17.82) v1(3.48,15.82) v1(3.48,13.82) v1(3.48,11.82) v1(3.48,9.82) v1(3.48,7.83) v1(3.48,5.83) v1(3.67,22.47) v1(3.87,26.3) v1(3.95,20.32) v1(4.3,0.88) v1(4.55,35.5) v1(4.55,33.5) v1(4.55,31.3) v1(4.65,49.23) v1(5.08,2.6) v1(5.17,46.77) v1(5.6,27.68) v1(5.75,0.88) v1(5.9,21.45) v1(6.08,17.8) v1(6.08,15.8) v1(6.08,13.8) v1(6.08,11.8) v1(6.08,9.8) v1(6.08,7.8) v1(6.08,5.8) v1(6.08,3.8) v1(6.65,49.23) v1(6.69,45.52) v1(7.05,35.52) v1(7.05,33.52) v1(7.05,31.32) v1(7.3,38.92) v1(7.28,37.27) v1(7.85,43.35) v1(7.85,27.88) v1(7.83,3.65) v1(8.03,41.4) v1(8.25,29.8) v1(8.4,21.23) v1(8.4,17.23) v1(8.4,15.22) v1(8.4,13.22) v1(8.4,11.22) v1(8.4,9.22) v1(8.4,7.22) v1(8.65,49.23) v1(8.82,29.5) v1(8.78,26.52) v1(8.85,19.45) v1(8.9,24.32) v1(8.88,22.2) v1(8.97,44.35) v1(9.32,33.7) v1(9.32,31.5) v1(9.7,30.1) v1(9.8,29.52) v1(9.88,4.8) v1(9.88,2.8) v1(9.88,0.8) v1(10.47,28.6) v1(10.6,30.05) v1(10.62,29.38) v1(10.65,49.23) v1(10.75,44.15) v1(10.75,24.1) v1(11.07,41.6) v1(11.18,38.6) v1(11.18,36.67) v1(11.2,35.73) v1(11.2,33.73) v1(11.2,31.52) v1(11.22,26.73) v1(11.2,21.35) v1(11.2,19.35) v1(11.2,17.35) v1(11.2,15.35) v1(11.2,13.35) v1(11.2,11.35) v1(11.2,9.35) v1(11.2,7.35) v1(11.32,4.8) v1(11.32,2.8) v1(11.32,0.8) v1(11.45,22.75) v1(12.03,45.62) v1(12.1,44.08) v1(12.28,24.15) v1(12.65,49.23) v1(12.7,47.08) v1(12.72,40.12) v1(13.18,22.85) v1(13.22,7.55) v1(13.4,28.55) v1(13.4,26.88) v1(13.5,45.73) v1(13.5,4.85) v1(13.5,2.85) v1(13.5,0.85) v1(13.65,40.65) v1(13.65,38.65) v1(13.65,36.65) v1(13.65,34.65) v1(13.65,32.65) v1(13.65,30.65) v1(14.1,44.08) v1(14.12,24.12) v1(14.2,21.25) v1(14.35,19.68) v1(14.35,17.68) v1(14.35,15.68) v1(14.35,13.68) v1(14.35,11.68) v1(14.35,9.68) v1(14.57,40.8) v1(14.65,49.23) v1(14.95,4.85) v1(14.95,2.85) v1(14.95,0.85) v1(15.25,40.7) v1(15.25,38.7) v1(15.25,36.7) v1(15.25,34.7) v1(15.25,32.7) v1(15.25,30.7) v1(15.4,22.5) v1(15.7,45.67) v1(15.93,28.73) v1(16.1,44.08) v1(16.07,25) v1(16.27,26.94) v1(16.65,49.23) v1(16.75,19.95) v1(16.75,17.95) v1(16.75,15.95) v1(16.75,13.95) v1(16.75,11.95) v1(16.75,9.95) v1(16.75,7.95) v1(17.35,38.52) v1(17.35,36.52) v1(17.35,34.52) v1(17.35,32.52) v1(17.35,30.52) v1(17.8,25.18) v1(17.85,27.15) v1(18,28.82) v1(18.15,41.75) v1(18.23,23.5) v1(18.2,4.83) v1(18.2,2.83) v1(18.2,0.82) v1(18.48,43.62) v1(18.5,37.12) v1(18.65,49.23) v1(18.57,20.12) v1(18.93,45.6) v1(19.27,26.85) v1(19.38,41.75) v1(19.48,18.7) v1(19.48,16.7) v1(19.48,14.7) v1(19.48,12.7) v1(19.48,10.7) v1(19.48,8.7) v1(19.48,6.7) v1(19.62,38.6) v1(19.62,36.6) v1(19.62,32.6) v1(19.62,30.6) v1(20.07,4.92) v1(20.07,2.92) v1(20.07,0.93) v1(20.48,43.62) v1(20.65,49.23) v1(20.8,20.62) v1(20.93,45.6) v1(21,34.2) v1(21.15,37.88) v1(21.12,36.35) v1(21.2,30.4) v1(21.23,28.88) v1(21.3,32.25) v1(21.32,22.25) v1(21.5,17.88) v1(21.6,23.38) v1(21.62,3.67) v1(21.9,20.68) v1(22.1,32.8) v1(22.12,24.05) v1(22.07,4.8) v1(22.23,28.68) v1(22.18,27.15) v1(22.3,41.1) v1(22.45,47.4) v1(22.4,42.5) v1(22.4,26.65) v1(22.48,43.62) v1(22.65,49.23) v1(22.6,22.25) v1(22.65,2.62) v1(22.73,14.95) v1(22.73,12.95) v1(22.73,10.95) v1(22.93,45.6) v1(22.9,8.9) v1(22.9,6.9) v1(22.98,4.88) v1(22.98,0.88) v1(23.27,16.62) v1(23.45,47.4) v1(23.68,37.52) v1(23.73,35.3) v1(24.02,25.6) v1(24.48,43.62) v1(24.65,49.23) v1(25.02,7.1) v1(25.12,14.25) v1(25.12,11.15) v1(25.12,9.15) v1(25.2,36.05) v1(25.18,21.15) v1(25.18,12.9) v1(25.32,30.55) v1(25.45,47.4) v1(25.35,27.73) v1(25.38,18.85) v1(25.8,3.92) v1(25.9,0.9) v1(26.2,17.2) v1(26.65,49.23) v1(26.75,30.15) v1(26.85,6.97) v1(27.3,8.72) v1(27.48,45.67) v1(27.77,35.12) v1(27.82,32.3) v1(27.75,27.8) v1(27.83,17.07) v1(27.93,25.02) v1(28.1,33.77) v1(28.1,10.6) v1(28.15,3.85) v1(28.23,45.85) v1(28.38,25.5) v1(28.5,37.92) v1(28.65,49.23) v1(28.57,44.35) v1(28.73,1.02) v1(28.75,42.8) v1(28.9,20.1) v1(29,24.7) v1(29.12,25.32) v1(29.1,6.7) v1(29.23,40.12) v1(29.27,13.65) v1(29.5,10.12) v1(29.8,32.67) v1(29.95,30.27) v1(29.88,25.35) v1(29.93,24.65) v1(30.27,37.98) v1(30.65,49.23) v1(30.62,25.35) v1(30.62,3.75) v1(30.82,24.55) v1(31,0.82) v1(31.12,16.45) v1(31.65,32.77) v1(31.68,36.02) v1(31.85,30.38) v1(32.23,45.38) v1(32.17,39.05) v1(32.23,27.4) v1(32.38,26) v1(32.35,25) v1(32.4,19.95) v1(32.48,43.12) v1(32.45,30.77) v1(32.65,49.23) v1(32.77,17.63) v1(32.85,35.3) v1(33,0.82) v1(33.08,3.92) v1(33.48,13.75) v1(33.6,30.12) v1(33.67,10) v1(33.92,43.77) v1(34,28.38) v1(34.25,45.5) v1(34.65,49.23) v1(34.62,42.65) v1(34.62,26.38) v1(34.67,38) v1(34.67,36.38) v1(34.73,22.82) v1(34.95,40.65) v1(35,0.82) v1(35.08,39.17) v1(35.27,6.8) v1(35.55,47.4) v1(35.5,3.92) v1(36.17,36.62) v1(36.27,21.15) v1(36.45,49.23) v1(36.62,22.25) v1(36.58,13.6) v1(36.65,11.15) v1(36.88,33.9) v1(36.88,32) v1(36.88,30.12) v1(36.92,8.32) v1(37,0.82) v1(37.08,28.02) v1(37.08,25.95) v1(37.33,35.73) v1(37.55,39.12) v1(37.55,38) v1(37.8,42.08) v1(37.92,29.4) v1(38,16.85) v1(38.15,28) v1(38.08,1.77) v1(38.2,45) v1(38.42,43.3) v1(38.38,3.95) v1(38.45,49.23) v1(38.55,23.5) v1(38.85,37.12) v1(38.92,7.97) v1(38.98,31.9) v1(38.99,30.02) v1(39.05,26.52) v1(39,0.82) v1(39.33,10.25) v1(39.52,46.23) v1(39.45,37.7) v1(39.55,23.68) v1(39.75,27.9) v1(39.75,16.77) v1(40.02,40.7) v1(40.12,32.9) v1(40.1,19.23) v1(40.35,25.23) v1(40.45,49.23) v1(40.5,43.45) v1(40.65,3.92) v1(40.7,30.98) v1(40.7,11.75) v1(40.9,1.7) v1(41,0.82) v1(41.6,19.35) v1(41.7,35.88) v1(41.73,34.6) v1(42.23,48.6) v1(42.17,45.12) v1(42.2,22.85) v1(42.35,25.18) v1(42.45,49.23) v1(42.88,25.95) v1(42.92,23.18) v1(42.95,44.88) v1(43,37.52) v1(43.02,12.12) v1(43,0.82) v1(43.33,3.85) v1(43.55,41) v1(43.55,35.75) v1(43.55,1.82) v1(43.77,7) v1(43.88,32.25) v1(44,34.52) v1(44.05,30.32) v1(43.95,8.62) v1(44.12,28.05) v1(44.17,10.35) v1(44.33,23.25) v1(44.3,14.22) v1(44.45,49.23) v1(45,0.82) v1(45.1,5.72) v1(45.25,27.9) v1(45.45,24.02) v1(45.58,22.32) v1(45.75,16.1) v1(45.77,7) v1(45.95,45.62) v1(45.95,8.62) v1(46.25,12.18) v1(46.17,10.35) v1(46.45,49.23) v1(46.6,33.08) v1(46.75,28.95) v1(47,0.82) v1(47.2,41.67) v1(47.27,20.23) v1(47.42,38.17) v1(47.4,16.5) v1(47.48,25.18) v1(47.55,18.88) v1(47.62,22.25) v1(47.77,7) v1(47.95,24.93) v1(48,13.9) v1(47.95,8.62) v1(48.35,36.25) v1(48.45,49.23) v1(48.45,38.1) v1(48.5,33.35) v1(48.55,24.73) v1(48.73,5.97) v1(48.75,30.5) v1(48.88,40.08) v1(48.88,22.23) v1(49,10.53) v1(49,0.82) v1(49.2,4.15) v1(49.8,32.2) v1(49.76,29.04) v1(49.77,7) v1(50.02,36.23) v1(49.95,8.62) v1(50.08,14.72) v1(50.2,22.12) v1(50.17,5.28) v1(50.33,27.3) v1(50.45,49.23) v1(50.55,33.25) v1(50.45,12.5) v1(51,0.82) v1(51.08,10.45) v1(51.17,20.65) v1(51.35,8.53) v1(51.52,41.5) v1(51.6,33.27) v1(51.85,14.45) v1(51.98,16.9) v1(52.08,36.23) v1(52.17,18.48) v1(52.35,20.55) v1(52.45,49.23) v1(52.5,22.07) v1(52.58,32.05) v1(52.6,28.9) v1(52.58,6.05) v1(52.83,39.25) v1(52.88,4.17) v1(53,0.82) v1(53.12,7.5) v1(53.42,42.77) v1(53.42,12.53) v1(53.42,10.3) v1(53.48,45.4) v1(53.52,37.75) v1(53.77,36.95) v1(54.17,25.1) v1(54.45,49.23) v1(54.5,36.35) v1(54.52,34) v1(54.48,31.9) v1(54.65,16.55) v1(55,0.82) v1(55.15,18.73) v1(55.2,20.62) v1(55.23,13.35) v1(55.27,24.75) v1(55.3,8.97) v1(55.4,28.52) v1(55.48,10.95) v1(55.83,36.4) v1(55.83,33.88) v1(55.85,38.8) v1(55.92,6.33) v1(55.98,40.65) v1(56.05,30.25) v1(56.33,42.38) v1(56.45,49.23) v1(56.52,45.48) v1(56.58,4.3) v1(56.7,37.48) v1(56.73,22.93) v1(56.83,15.45) v1(56.88,18.02) v1(57,26.73) v1(57,12.35) v1(57,0.82) v1(57.25,33.92) v1(57.34,36.39) v1(57.4,31.88) v1(57.62,8.82) v1(57.67,41) v1(58.12,38.27) v1(58.27,22.05) v1(58.3,17) v1(58.27,14.15) v1(58.4,12.18) v1(58.45,49.23) v1(58.58,6.6) v1(58.7,34) v1(58.83,30.18) v1(58.75,28.07) v1(59,36.46) v1(58.95,24.93) v1(59,0.82) v1(59.34,31.71) v1(59.38,9.7) v1(59.42,2.42) v1(59.45,4.15) v1(59.77,40.98) v1(59.77,21.23) v1(59.95,34.05) v1(60.02,12.38) v1(60.12,38.27) v1(60.08,19.32) v1(60.12,16.23) v1(60.23,45.83) v1(60.17,26.82) v1(60.45,49.23) v1(60.6,41.77) v1(60.6,39.77) v1(60.65,9.03) v1(60.75,28.3) v1(60.75,23.07) v1(61,36.46) v1(61,0.82) v1(61.23,29.9) v1(61.38,25.45) v1(61.77,38.27) v1(61.77,32.33) v1(61.75,6.55) v1(62.33,45.1) v1(62.45,49.23) v1(62.65,36.46) v1(62.73,26.3) v1(62.67,10) v1(62.75,40.35) v1(62.92,30.82) v1(62.92,28.27) v1(63.02,34.03) v1(63.08,45.77) v1(63.15,0.93) v1(63.48,2.05) v1(63.67,24.48) v1(63.67,22.02) v1(63.67,18.73) v1(63.77,38.27) v1(63.9,31.5) v1(64.25,29.3) v1(64.25,26.85) v1(64.3,34.05) v1(64.45,49.23) v1(64.47,45.7) v1(64.47,43.7) v1(64.47,42.05) v1(64.47,40.05) v1(64.66,38.82) v1(64.69,37.63) v1(64.65,36.46) v1(64.69,32.97) v1(64.67,31.58) v1(64.8,3.62) v1(65.21,39.71) v1(65.15,0.93) v1(65.31,30.83) v1(65.47,25.2) v1(65.47,23.2) v1(65.47,21.55) v1(65.47,19.55) v1(65.9,30.07) v1(66.02,39.67) v1(66.03,27.9) v1(66.1,12) v1(66.25,14.12) v1(66.2,9.22) v1(66.45,49.23) v1(66.51,30.81) v1(66.72,6.8) v1(66.95,15.97) v1(67.12,43.45) v1(67.12,41.8) v1(67.12,39.8) v1(67.22,26.7) v1(67.51,30.85) v1(67.47,30.18) v1(68.09,39.68) v1(68.36,30.83) v1(68.55,48.88) v1(68.65,15.72) v1(68.8,21.6) v1(68.78,4.28) v1(68.95,26.68) v1(69.03,24.18) v1(68.97,12.5) v1(68.97,10.03) v1(68.95,7.42) v1(69.12,5.28) v1(69.15,45.33) v1(69.15,43.33) v1(69.15,41.67) v1(69.15,39.67) v1(69.22,30.88) v1(69.15,30.1)
VBAT: length 9.7
  TOP w0.3: J0106.2 38.17,21.95 R0114.2 40.94,21.96 40.94,23.34 41.73,24.12 C0116.1 U0103.1
VCC_5V: length 7.4
  TOP w0.15: R0105.2 v1(16.73,39.6)
  TOP w0.5: 15.78,42.6 v1(16.32,42.6) U0102.1
  TOP w1: S0101.3 11.62,42.67
  INNER LAYER 3 w0.15: v1(16.32,42.6) 16.73,42.2 v1(16.73,39.6)
VDD_3V3: length 102.3
  TOP w0.2: R0106.1 21.95,28.12 23.13,26.95 v1(23.48,26.95) ; R0211.2 33.6,31.75 R0201.2 ; 20.52,24.18 20.2,24.5 U0101.7
  TOP w0.25: R0211.2 33.58,30.9 31,28.32 27.32,28.32 26.77,27.77 R0119.1
  TOP w0.3: 57.17,1.76 57.08,1.86 57.08,1.89 ; 57.17,1.76 59.79,1.76 60.38,2.35 D0203.2 ; 57.17,1.76 56.95,1.76 ; 53.77,1.84 53.77,2.14 ; 53.77,1.84 53.48,1.84 ; 53.77,1.84 54.08,1.84 ; 53.77,2.14 54.08,1.84 ; 53.77,2.14 D0204.2 ; 53.77,2.14 53.48,1.84 ; 50.48,2.12 50.75,1.84 ; 50.48,2.12 D0205.2 ; 50.48,2.12 50.48,2.09 ; 50.75,1.84 50.48,1.84 ; 50.75,1.84 53.47,1.84 53.48,1.84 ; 41.38,9.25 41.38,9.24 41.87,8.75 ; 41.38,9.25 R0210.1 ; 41.38,9.25 41.38,9.26 41.87,9.75 ; 41.38,9.25 41.87,9.25 ; 54.08,1.84 54.15,1.76 56.95,1.76 ; 50.23,1.84 50.48,2.09 ; 50.23,1.84 47.12,1.84 46.65,2.32 D0201.2 45.33,4.3 R0212.1 ; 50.23,1.84 50.48,1.84 ; 50.48,2.09 50.48,1.84 ; D0104.2 R0116.2 ; 56.95,1.76 57.08,1.89 ; 57.08,1.89 D0202.2 ; 20.52,24.18 D0102.2 v1(23.27,22.8)
  TOP w0.5: R0212.1 44.1,5.25 J0201.1 41.87,5.47 41.87,12.23 38.88,15.22 26.8,15.22 23.27,18.75 v1(23.27,22.8)
  TOP w1: J0108.1 22.12,34.65 22.12,38.77
  INNER LAYER 3 w0.6: v1(23.48,26.95) 23.27,26.75 v1(23.27,22.8)
  INNER LAYER 3 w1: J0108.1 23.38,33.4 23.38,26.95
  vias: v1(23.45,26.43)
VDD_3V3_M: length 76.4
  TOP w0.25: 41.33,42.58 39.88,42.58 35.5,38.2 35.5,34.66 J0110.1
  TOP w0.3: 45.83,18.15 45.83,17.8 ; 45.83,18.15 R0115.1 ; 45.83,18.15 45.83,18.15 46.17,17.8 ; 45.83,18.15 45.82,18.15 45.48,17.8 ; 35.48,28.57 39.25,28.57 39.98,29.3 R0117.1 ; U0103.3 44.9,22.77 44.02,21.9 42.12,21.9 41.27,21.05 R0114.1 ; J0110.1 35.51,34.88 37.12,36.5 R0113.2 39.83,36.4 40.05,36.17 R0118.1 ; R0107.1 50.53,17.8 J0101.1
  TOP w0.5: R0114.1 39.77,21.05 J0106.1 39.77,17.8 J0107.1 J0101.1 ; 31.65,26.7 33.6,26.7 35.48,28.57 J0109.1 35.48,34.62 J0110.1 ; 31.5,26.85 D0110.1
  TOP w0.6: J0106.1 35.07,19.43 31.65,22.85 31.65,26.7 31.5,26.85
VDDA: length 3.5
  TOP w0.3: B0101.1 46.65,21.07 R0115.2 44.38,21.07 J0107.2
VDDPA: length 5.1
  TOP w0.3: J0110.2 38.15,34.55 R0118.2 40.6,34.55 41.15,34 U0103.53
VDDRF: length 5.1
  TOP w0.3: J0109.2 38.17,31.15 R0117.2 40.42,31.6 U0103.57
VDDSMPS: length 12.8
  TOP w0.3: U0103.13 v1(50.9,25.02) ; J0101.2 50.38,20.34 R0107.2 v1(52.05,19.45)
  INNER LAYER 3 w0.3: v1(50.9,25.02) 52.42,25.02 53.17,24.27 53.17,20.35 52.27,19.45 v1(52.05,19.45)
50OHM_LORA_2: length 1.9
  TOP w0.41: R0120.2 C0102.2 56.92,35.2
50OHM_LORA_3: length 7.7
  TOP w0.41: J0103.1 D0105.2 C0101.2 R0120.1
90OHM_USB_DN: length 4.8
  TOP w0.228: R0111.2 11.7,25.05 11.75,25.05 12.25,25.55 12.61,25.55 12.83,25.32 12.83,24.95 13.06,24.73 13.52,24.73 13.75,24.95 13.75,25.32 13.97,25.55 14.32,25.55 14.38,25.5 U0101.2
90OHM_USB_DN_C: length 7.6
  TOP w0.228: R0111.1 10.75,25.05 10.62,25.18 D0107.2 9.26,25.18 9.11,25.32 7.9,25.32 7.83,25.25 J0102.A7 5.98,25.25 5.75,25.02 5.75,23.98 5.98,23.75 J0102.B7
90OHM_USB_DP: length 3.5
  TOP w0.228: R0110.2 11.7,25.9 14.22,25.9 14.32,26 U0101.1
90OHM_USB_DP_C: length 8.8
  TOP w0.228: R0110.1 D0106.2 9.26,25.85 9.09,25.68 7.9,25.68 7.83,25.75 J0102.A6 5.97,25.75 5.38,25.15 5.38,23.85 5.97,23.25 J0102.B6
ANT_LORA: length 2.5
  TOP w0.3: 54.17,35.2 U0103.30
  TOP w0.41: R0121.2 54.17,35.2
BOOT0: length 6.9
  TOP w0.15: U0103.41 47.9,40.23 46.27,41.85 J0111.2
CH340_RX: length 7.7
  TOP w0.15: R0102.1 21.62,26 22.38,26 26.2,22.18 J0113.1
CH340_TX: length 9.3
  TOP w0.15: R0101.1 21.62,25.35 22.55,25.35 26.12,21.77 26.12,20.63 J0112.1
I2C1_SCL_PA9: length 15.9
  TOP w0.15: U0103.51 v1(41.27,35.2) ; 30.75,34.24 32.22,34.24 32.22,34.25 R0201.1 v1(32.7,33.45)
  INNER LAYER 3 w0.15: v1(32.7,33.45) 33.05,33.1 39.15,33.1 39.9,32.35 40.8,32.35 40.95,32.5 40.95,34.88 v1(41.27,35.2)
I2C1_SDA_PA10: length 15
  TOP w0.15: 30.75,31.7 32.66,31.7 R0211.1 v1(32.67,32.42) ; v1(41.67,29.8) U0103.60
  INNER LAYER 3 w0.15: v1(41.67,29.8) 41.66,29.8 41.2,30.26 41.2,31.6 40.83,31.97 39.8,31.97 39.02,32.75 33,32.75 v1(32.67,32.42)
J_TDI_PA15: length 41.2
  TOP w0.15: U0103.10 v1(49.1,25.07)
  INNER LAYER 3 w0.15: J0201.5 41.14,9.38 48.8,9.38 56.08,16.65 56.08,25.27 55.75,25.6 50.52,25.6 50,25.07 v1(49.1,25.07)
LPUART1_RX_PA3: length 36.4
  TOP w0.15: U0103.35 v1(51.5,38.35)
  INNER LAYER 3 w0.15: v1(51.5,38.35) 51.75,38.6 52.33,38.6 52.73,38.2 52.73,37.92 52.12,37.33 51.88,37.33 51.33,36.77 51.33,34.95 48.17,31.8 48.17,29.23 46.05,27.1 36.98,27.1 30,20.12 J0112.2
LPUART1_TX_PA2: length 32.1
  TOP w0.15: U0103.34 v1(52.1,38.08)
  INNER LAYER 3 w0.15: v1(52.1,38.08) 51.02,37 51.02,35.17 47.8,31.95 47.8,29.3 45.9,27.4 36.75,27.4 31.52,22.18 J0113.2
PA0: length 26.1
  TOP w0.15: U0103.62 v1(41.85,28.6)
  INNER LAYER 3 w0.15: v1(41.85,28.6) 43.38,28.6 44.73,29.95 44.73,34.17 47.95,37.4 49.28,37.4 50.27,38.4 50.27,41.6 52.74,44.07 52.74,47.52
PA1: length 29.5
  TOP w0.15: v1(41.2,28.57) 41.2,28.62 41.77,29.2 U0103.61
  INNER LAYER 3 w0.15: v1(41.2,28.57) 41.2,28.32 41.4,28.12 43.33,28.12 45.08,29.88 45.08,34.02 48.1,37.05 49.42,37.05 50.62,38.25 50.62,41.39 55.28,46.05 55.28,47.52
PA8: length 18.5
  TOP w0.15: v1(46.1,39.17) U0103.44
  INNER LAYER 3 w0.15: J0203.1 38.84,41.9 40.58,41.9 43.38,39.1 46.02,39.1 v1(46.1,39.17)
PA12: length 46.3
  TOP w0.15: 58.48,5.08 v1(59.12,5.08) ; U0103.64 41.42,27.4 41.1,27.07 v1(41.1,26.35)
  INNER LAYER 3 w0.15: v1(41.1,26.35) 41.17,26.43 46.2,26.43 47.55,27.77 58,27.77 62,23.77 62,8.97 59.12,6.1 v1(59.12,5.08)
PB1: length 26.4
  TOP w0.15: J0203.2 30.57,40.42 v1(30.73,40.27) ; U0103.55 v1(42.02,32.8)
  INNER LAYER 3 w0.15: v1(42.02,32.8) 42.52,32.8 42.67,32.95 42.67,37.05 39.67,40.05 30.88,40.05 30.73,40.2 v1(30.73,40.27)
PB2: length 30.1
  TOP w0.15: U0103.59 v1(42.15,30.4) ; J0203.3 28.27,47.62 30.1,45.8 30.1,40.35 v1(30,40.25)
  INNER LAYER 3 w0.15: v1(30,40.25) 30.55,39.7 39.58,39.7 42.3,36.98 42.3,33.5 42.15,33.35 41.83,33.35 41.55,33.08 41.55,32.25 42.15,31.65 v1(42.15,30.4)
PB4: length 26.1
  TOP w0.15: U0103.16 52.7,25.6 59.2,19.1 59.2,11.97 62.4,8.78 62.4,5.2 62.25,5.05 Q0204.1
PB5: length 26.1
  TOP w0.15: J0204.1 63.25,8.22 63.25,10.2 61.25,12.2 61.25,21.18 55.02,27.4 U0103.17
PB8: length 22.8
  TOP w0.15: J0204.4 63.08,16.02 63.08,25.07 58.62,29.52 54.35,29.52 54.08,29.8 U0103.21
PB9: length 35
  TOP w0.15: Q0201.1 v1(52.67,5.12) ; U0103.8 v1(47.9,25.68)
  INNER LAYER 3 w0.15: v1(47.9,25.68) 48.1,25.88 49.8,25.88 50.15,26.23 56.05,26.23 59.02,23.25 59.02,11.47 v1(52.67,5.12)
PB10: length 25.7
  TOP w0.15: U0103.39 v1(49.1,38.38)
  INNER LAYER 3 w0.15: v1(49.1,38.38) 48.77,38.7 43.25,38.7 40.38,41.58 27.18,41.58 J0209.1
PB11: length 23.2
  TOP w0.15: v1(46.7,38.2) U0103.43
  INNER LAYER 3 w0.15: v1(46.7,38.2) 43.27,38.2 40.25,41.23 27.56,41.23 J0209.2
PB12: length 19
  TOP w0.15: v1(39.8,33.62) 40.02,33.4 U0103.54
  INNER LAYER 3 w0.15: v1(39.8,33.62) 39.8,34.88 37.27,37.4 J0209.3
PB13: length 21.6
  TOP w0.15: U0103.58 41.61,31 40.83,30.22 v1(40.83,29.5)
  INNER LAYER 3 w0.15: J0209.4 28.61,32.52 28.61,30.34 30.02,28.93 40.25,28.93 v1(40.83,29.5)
PB14: length 37.3
  TOP w0.15: U0103.5 v1(46.1,25.65) ; Q0205.1 v1(55.88,5.15)
  INNER LAYER 3 w0.15: v1(55.88,5.15) 55.88,5.47 60.65,10.25 60.65,22.1 56.23,26.52 49.95,26.52 49.62,26.2 47.45,26.2 46.9,25.65 v1(46.1,25.65)
PB15: length 34.8
  TOP w0.15: Q0202.1 v1(48.83,5) ; U0103.9 v1(48.5,25.38)
  INNER LAYER 3 w0.15: v1(48.83,5) 57.55,13.72 57.55,24.27 55.92,25.9 50.33,25.9 50,25.57 48.7,25.57 v1(48.5,25.38)
PC0: length 22.8
  TOP w0.15: J0207.1 64.72,21.12 64.72,25.57 58.95,31.35 54.33,31.35 54.08,31.6 U0103.24
PC1: length 21.8
  TOP w0.15: J0204.5 64.38,17.25 64.38,25.5 58.88,31 U0103.23
PC2: length 24.8
  TOP w0.15: U0103.20 58.52,29.2 62.67,25.05 62.67,13.88 J0204.3
PC3: length 24
  TOP w0.15: U0103.18 54.88,28 61.55,21.32 61.55,12.46 J0204.2
PC4: length 19.4
  TOP w0.15: U0103.26 59.57,32.8 66.72,25.65 66.72,24.2 J0207.3
PC5: length 21.7
  TOP w0.15: J0207.2 66.38,22.01 66.38,25.5 59.4,32.48 54.38,32.48 54.1,32.2 U0103.25
PC6: length 17.8
  TOP w0.15: J0207.4 67.39,25.44 59.73,33.1 54.42,33.1 54.12,33.4 U0103.27
RESET_N: length 81.9
  TOP w0.15: U0103.49 40.83,36.4 R0113.1 v1(40.73,37.3) ; 24.31,5.25 23.53,6.03 D0103.2 S0102.2 S0102.1 ; 35.42,9.22 v1(35.42,8.55)
  INNER LAYER 3 w0.15: 24.54,8.09 24.71,8.09 ; 24.54,8.09 24.54,8.28 ; 24.54,8.09 24.54,7.92 ; 24.71,8.09 24.72,8.09 ; 24.71,8.09 24.54,7.92 ; 24.54,8.28 24.54,37.72 25.4,38.58 39.45,38.58 v1(40.73,37.3) ; 24.54,8.28 24.72,8.09 ; 24.54,7.92 24.54,5.48 24.31,5.25 ; 24.72,8.09 34.97,8.09 v1(35.42,8.55)
SPI1_MISO_PA6: length 11.4
  TOP w0.15: U0103.48 v1(43.7,39.88)
  INNER LAYER 3 w0.15: J0206.3 45.02,46.25 45.02,41.2 v1(43.7,39.88)
SPI1_MOSI_PA7: length 20.3
  TOP w0.15: U0103.38 49.7,38.84 52.17,41.31 52.17,44.12 51.42,44.88 43.86,44.88 J0206.4
SPI1_NSS_PA4: length 13.4
  TOP w0.15: J0206.1 49.88,47.52 52.9,44.5 52.9,40.92 50.9,38.92 U0103.36
SPI1_SCK_PA5: length 16.1
  TOP w0.15: J0206.2 46.29,46.78 47.83,45.25 51.67,45.25 52.58,44.35 52.58,41.02 50.3,38.75 U0103.37
SWCLK_PA14: length 37.6
  TOP w0.15: U0103.4 v1(45.5,24.8) ; v1(33.62,9.22) 32.92,9.22 32.92,6.24 J0201.9
  INNER LAYER 3 w0.15: v1(45.5,24.8) 46.45,23.85 46.45,18.15 43.44,15.14 43.13,15.14 42.39,15.88 42.18,15.88 41.96,15.66 41.96,15.45 42.7,14.71 42.7,14.5 42.49,14.29 42.28,14.29 41.5,15.06 41.29,15.06 41.08,14.85 41.08,14.64 41.85,13.87 41.85,13.65 41.64,13.44 41.43,13.44 40.65,14.22 40.44,14.22 40.23,14 40.23,13.79 41,13.02 41,12.8 37.8,9.6 34,9.6 v1(33.62,9.22)
SWDIO_PA13: length 37.6
  TOP w0.15: U0103.63 41.55,28 v1(39.59,26.04) ; v1(30.35,6.65) R0207.1 v1(29.6,9.18)
  INNER LAYER 3 w0.15: v1(39.59,26.04) 28.04,14.49 26.86,14.49 26.05,13.68 26.05,11.28 28.15,9.18 v1(29.6,9.18) ; J0201.7 32.97,6.75 30.45,6.75 v1(30.35,6.65)
T_SWO_PB3: length 42.5
  TOP w0.15: v1(54.4,23.15) 54.4,23.27 52.1,25.57 U0103.15
  INNER LAYER 3 w0.15: v1(54.4,23.15) 54.4,17.77 48.15,11.53 41.4,11.53 37.3,7.42 29.03,7.42 26.85,5.25
USART1_RX_PB7: length 22.4
  TOP w0.15: U0103.19 v1(54.65,28.6)
  INNER LAYER 3 w0.15: J0208.4 59.05,46.21 59.05,40.6 55.33,36.88 55.33,30.35 54.65,29.68 v1(54.65,28.6)
USART1_TX_PB6: length 20.3
  TOP w0.15: U0103.22 v1(54.58,30.4)
  INNER LAYER 3 w0.15: J0208.3 58.55,46.8 58.55,40.6 55,37.05 55,30.55 54.85,30.4 v1(54.58,30.4)
N00687: length 38.5
  TOP w0.3: v1(8.12,27) 8.08,27.05 J0102.B9 ; J0102.A9 7.86,21.95 v1(8,22.1) 7.86,22.25 J0102.B4 ; J0102.A4 8.1,26.75
  TOP w1: 9.84,27.5 10.7,27.5 12.53,29.32 12.53,38.85 11.21,40.17 S0101.2
  INNER LAYER 3 w0.5: v1(8,22.1) 8.12,22.23 v1(8.12,27)
  INNER LAYER 3 w1: S0101.2 7.75,40.17 6.9,41.02 6.9,44.05 7.93,45.08 J0104.2 J0104.1
N16030587: length 3.1
  TOP w0.15: R0106.2 C0105.2 20,26.6 20,26.25 19.75,26 U0101.10
N16030701: length 1.5
  TOP w0.15: U0101.8 19.83,25 20,25.18 R0101.2
N16030737: length 1.7
  TOP w0.15: R0102.2 19.88,25.5 U0101.9
N16030765: length 3.1
  TOP w0.2: R0103.2 16.82,23.3 17.52,24 U0101.6
N16030785: length 1.3
  TOP w0.25: R0103.1 D0102.1
N16031948: length 1.1
  TOP w0.15: U0102.3 16.23,40.7 R0105.1
N16031996: length 6.6
  TOP w0.5: J0108.2 20.48,35.05 R0116.1 ; U0102.5 C0108.2
N16032104: length 1.3
  TOP w0.3: D0104.1 R0108.1
N16044226: length 3.3
  TOP w0.3: L0102.2 52.15,24.62 51.5,25.27 U0103.14
N16044230: length 2.5
  TOP w0.3: C0117.1 49.7,24.12 U0103.11
N16044759: length 2.4
  TOP w0.15: J0111.3 R0112.1
N16050454: length 5.7
  TOP w0.3: 47.02,25.57 46.7,25.9 U0103.6 ; 47.02,25.57 47.3,25.85 U0103.7 ; 47.02,25.57 46.9,25.45 46.9,24.15 C0115.2 C0114.2 46.8,22.18 B0101.2
N16074451: length 2.3
  TOP w0.15: R0207.2 30.35,12.37 J0205.2
N16074491: length 2.3
  TOP w0.15: R0208.2 32.9,10.15 J0205.3
N16074519: length 2.3
  TOP w0.15: J0205.4 35.44,10.14 R0209.2
N16074543: length 2.2
  TOP w0.15: J0205.5 37.98,10.15 R0210.2
N16076601: length 3.2
  TOP w0.3: J0201.2 44.35,2.71 R0212.2
N16077605: length 1.4
  TOP w0.3: Q0201.3 51.08,4.17
N16077613: length 1.2
  TOP w0.3: R0202.2 D0205.1
N16077691: length 1.4
  TOP w0.15: Q0202.3 R0203.1
N16077699: length 1.1
  TOP w0.15: R0203.2 D0201.1
N16077773: length 1.3
  TOP w0.3: Q0203.3 R0204.1
N16077801: length 1.2
  TOP w0.3: R0204.2 D0202.1
N16077881: length 1.4
  TOP w0.3: Q0204.3 60.98,4.08
N16077901: length 1.1
  TOP w0.3: R0205.2 D0203.1
N16077963: length 1.3
  TOP w0.3: Q0205.3 R0206.1
N16077967: length 1.2
  TOP w0.3: R0206.2 D0204.1
N16137832: length 2.4
  TOP w0.15: J0111.1 R0109.2
N160326830: length 2.3
  TOP w0.5: R0104.2 S0101.1

## Copper pours and planes (outline as drawn; the poured copper is in the pictures)
GND on TOP (solid shape): 66.55,37.42 65.55,37.42 65.55,39.73 66.55,39.73
GND on TOP (solid shape): 66.67,30.8 65.67,30.8 65.67,33.1 66.67,33.1
GND on TOP (solid shape): 69.03,37.48 68.03,37.48 68.03,39.77 69.03,39.77
GND on TOP (solid shape): 69.1,30.85 68.1,30.85 68.1,33.15 69.1,33.15
GND on TOP, BOTTOM, INNER LAYER 2, INNER LAYER 3: 2,0.5 0.94,0.94 0.5,2 0.5,48 0.94,49.06 2,49.5 68,49.5 69.06,49.06 69.5,48 69.5,2 69.06,0.94 68,0.5
VCC_5V on TOP: 10.9,43.17 15.75,43.17 16.05,42.88 16.05,42.33 15.9,42.17 10.97,42.17 10.9,42.25
VDD_3V3 on TOP: 21.6,39.88 22.35,39.88 22.65,39.58 22.65,38.42 21.57,38.42 21.57,39.85
VDD_3V3 on TOP: 27.05,26.2 27.05,27.25 23.23,27.25 22.95,26.98 22.95,26.23 23.1,26.07 26.93,26.07
VDD_3V3 on INNER LAYER 3: 22.98,27.43 23.8,27.43 23.88,27.35 23.88,26.2 23.6,25.93 23.15,25.93 22.88,26.2 22.88,27.32
VDD_3V3_M on TOP: 27.4,26.68 27.4,27.23 27.57,27.4 31.55,27.4 31.77,27.18 31.77,26.45 27.65,26.45 27.43,26.68
N00687 on TOP: 7.5,27.2 7.75,27.2 8.57,28.02 10.3,28.02 10.47,27.85 10.47,27.15 10.3,26.98 8.65,26.98 8.28,26.6 7.5,26.6
N16031996 on TOP: 20.18,38.8 20.18,42.12 20.05,42.25 20.05,42.95 20.85,42.95 20.85,39 20.65,38.8
N16044230 on TOP: 49.33,24.38 49.33,22.77 49.45,22.65 50.98,22.65 50.98,24.4 50.95,24.43 49.38,24.43

## Text on the board
BOTTOM: KG200Z-TE-B_V1.3_BOTTOM
Package Geometry/Pastemask Bottom: KG200Z-TE-B_V1.3_PASTEMASK_BOTTOM
Ref Des/Silkscreen Bottom: KG200Z-TE-B_V1.3_SILKSCREEN_BOTTOM
User.Comments: KG200Z-TE-B_V1.3_SOLDERMASK_BOTTOM | KG200Z-TE-B_V1.3_SOLDERMASK_TOP
TOP: KG200Z-TE-B_V1.3_TOP
Package Geometry/Pastemask Top: KG200Z-TE-B_V1.3_PASTEMASK_TOP
Ref Des/Silkscreen Top: CT | PB13 | PB10 | PB11 | PB12 | I2C | VDDPA | VDDRF | MOSI | MISO | SCK | BOOT | CS | PA0 | PA1 | PB6 | PB7 | KG200Z-TE-B_V1.3 | OFF | ON | RESET | 5V | GND | JTAG | SWD | VDDA | VDDSMPS | PB5 | PC1 | PB8 | PC3 | PC2 | PC5 | PC4 | PC6 | PC0 | PB2 | PB1 | PA8 | SWO | NC | VBAT | SWCLK | SWDIO | TDI | 3V3 | KG200Z-TE-B_V1.3_SILKSCREEN_TOP | LABLE POSITION | L YYWW
INNER LAYER 2: KG200Z-TE-B_V1.3_INNER LAYER 2
INNER LAYER 3: KG200Z-TE-B_V1.3_INNER LAYER 3
COMPVAL_TYPE_TOP: FIGURE | SIZE | 0.1 | 0.25 | 0.9398 | 1.01 | 1.02 | 1.07 | 1.2 | 3.2 | 1.2x0.6 | 1.4x0.6 | DRILL CHART: TOP to BOTTOM | ALL UNITS ARE IN MILLIMETERS | PLATED | NON-PLATED | QTY | 2 | 686 | 22 | 16 | 6 | 30 | 5 | 4
